# EAGLE board 3hub (EAGLE 6.1)
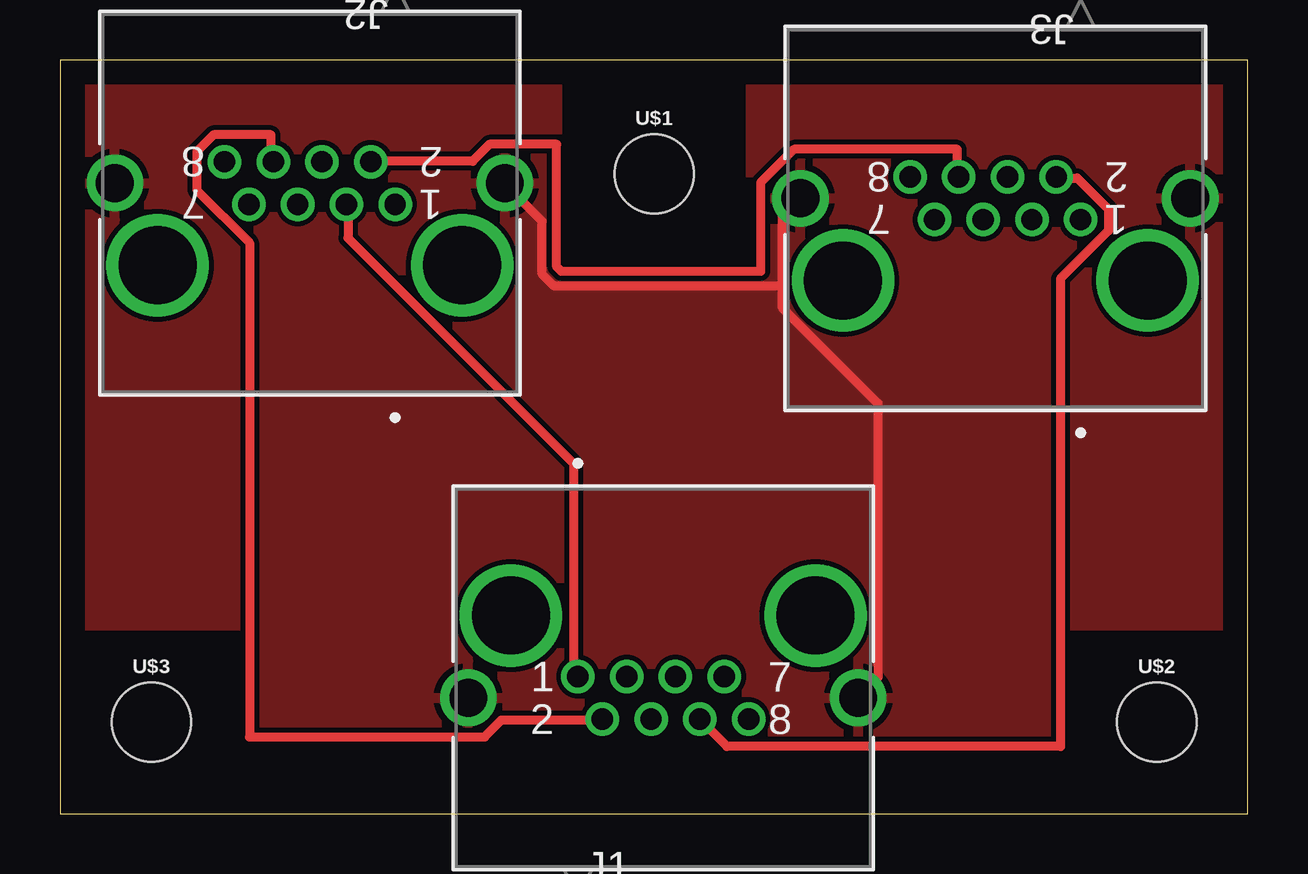
[diagram p0: board, top side]
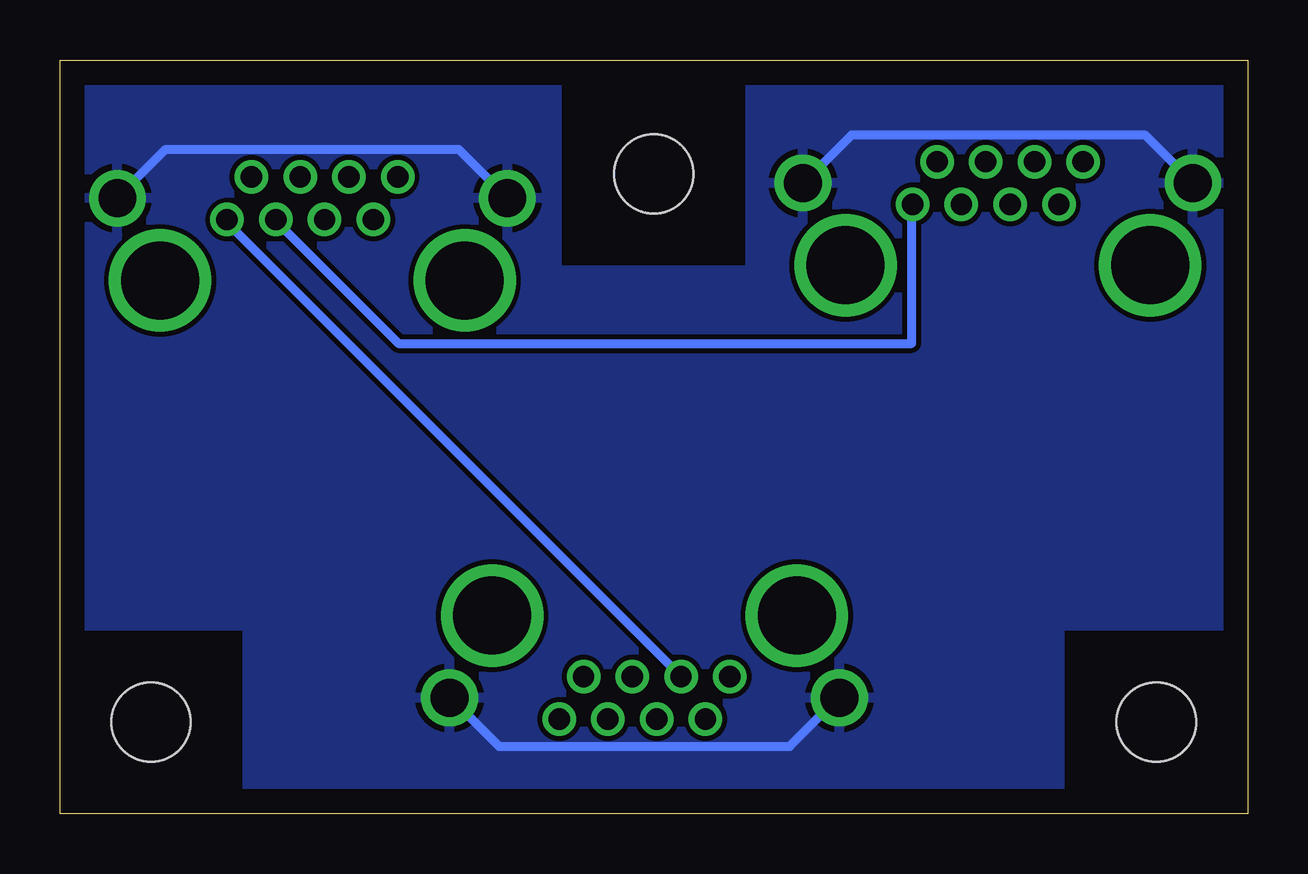
[diagram p1: board, bottom side, seen from below]

Size 49.51 x 31.42 mm. Coordinates in mm from the lower left corner, seen from the top.
Outline: 0,0 49.51,0 49.51,31.42 0,31.42 0,0
Copper layers (1*16): Top 0.035mm / dielectric 1.5mm / Bottom 0.035mm
Design rules: minimum track width 10mil, minimum drill 24mil, track to track 8mil, track to pad 8mil, pad to pad 8mil, via to via 8mil, smd to smd 8mil, copper to edge 40mil, drill to drill 8mil, minimum pad ring 10mil, minimum via ring 8mil, stop-mask expansion 4mil, vias tented up to drill 0mil, thermal gap 10mil
Net classes: 0 default: width 0.381 mm
tRestrict: area 41.9,0 to 49.5,7.6; area 0,0 to 7.6,7.6; area 21,22.9 to 28.6,30.5
bRestrict: area 41.9,0 to 49.5,7.6; area 0,0 to 7.6,7.6; area 21,22.9 to 28.6,30.5

## Footprints (pad centres in the part's own frame; a part is rotated, then mirrored left to right if it is on the bottom)
CONN8_406541_TEC = drill 0.889 pad 1.397: 1 0,0; 2 1.016,-1.778; 3 2.032,0; 4 3.048,-1.778; 5 4.064,0; 6 5.08,-1.778; 7 6.096,0; 8 7.112,-1.778 | drill 1.575 pad 2.083: 9 -4.572,-0.889; 10 11.684,-0.889 | drill 3.251 pad 3.251: 11 -2.794,2.54; 12 9.906,2.54
STAND-OFF = hole 3.302: 0,0

## Placement (x,y rotation side)
J1  1-406541-1  [CONN8_406541_TEC]  21.59,5.71 0 top
J2  1-406541-1  [CONN8_406541_TEC]  13.97,25.4 180 top
J3  1-406541-1  [CONN8_406541_TEC]  42.55,24.77 180 top
U$1  [STAND-OFF]  24.77,26.67 0 top
U$2  [STAND-OFF]  45.72,3.81 0 top
U$3  [STAND-OFF]  3.81,3.81 0 top

## Library data of the parts
J1-J3 = rhoban; COPYRIGHT: Copyright (C) 2021 Ultra Librarian. All rights reserved.; MANUFACTURER_PART_NUMBER: 1-406541-1; MFR_NAME: TE Connectivity; TYPE: Jack
U$1-U$3 = SparkFun-Hardware

## Nets
GND: J1.9 J1.10 J2.9 J2.10 J3.9 J3.10
T1+: J1.1 J2.3
T1-: J1.2 J2.6
T2+: J2.1 J3.3
T2-: J2.2 J3.6
T3+: J1.3 J3.1
T3-: J1.6 J3.2

## Tracks (layer width: path | path; a pad name or v marks a point on that pad's centre or on a via)
GND
  Top 0.381: 30.1,22 30.1,24.9 30.8,25.6 J3.10 | 30.1,22 30.1,21.1 34.1,17.1 34.1,5.7 33.3,4.9 J1.10 | 30.1,22 20.6,22 20.1,22.5 20.1,24.7 18.6,26.2 J2.9
  Bottom 0.381: J2.10 4.3,28.3 16.5,28.3 18.5,26.3 J2.9 | J1.9 17.1,4.8 19.1,2.8 31.2,2.8 33.2,4.8 J1.10 | J3.10 30.9,25.7 32.9,27.7 45.1,27.7 47.1,25.7 J3.9
  pour Bottom: 1.91,37.47 55.24,37.47 55.24,-6.35 -5.08,-6.35 -5.08,18.41
  pour Top: -1.91,36.83 53.98,36.83 53.98,-4.45 -5.71,-4.45 -5.71,20.32
T1+
  Top 0.381: J1.1 21.5,5.8 21.4,5.9 21.4,14.6 12,24 12,25.4 J2.3
T1-
  Top 0.381: J1.2 22.6,3.9 18.4,3.9 17.7,3.2 7.9,3.2 7.9,23.8 5.7,26 5.7,27.6 6.4,28.3 8.8,28.3 8.8,27.2 J2.6
T2+
  Bottom 0.381: J2.1 14,25.4 14,19.6 35.4,19.6 40.5,24.7 J3.3
T2-
  Top 0.381: J2.2 13,27.2 17.2,27.2 17.9,27.9 20.7,27.9 20.7,22.8 20.9,22.6 29.2,22.6 29.2,26.3 30.6,27.7 37.4,27.7 37.4,26.6 J3.6
T3+
  Bottom 0.381: J1.3 23.7,5.8 42.6,24.7 J3.1
T3-
  Top 0.381: J1.6 26.7,3.9 27.8,2.8 41.7,2.8 41.7,22.3 43.7,24.3 43.7,25.2 42.4,26.5 41.6,26.5 J3.2